# Altium PCB amirabbas_ahmadi.PcbDoc
Units mm, origin at the board's own origin, x right, y up, seen from the top; angles counter-clockwise.
Board outline 152.4 x 101.6 mm, 2 copper layers (Top Layer, Bottom Layer); 28 components, 23 nets, 118 pads, 55 vias.
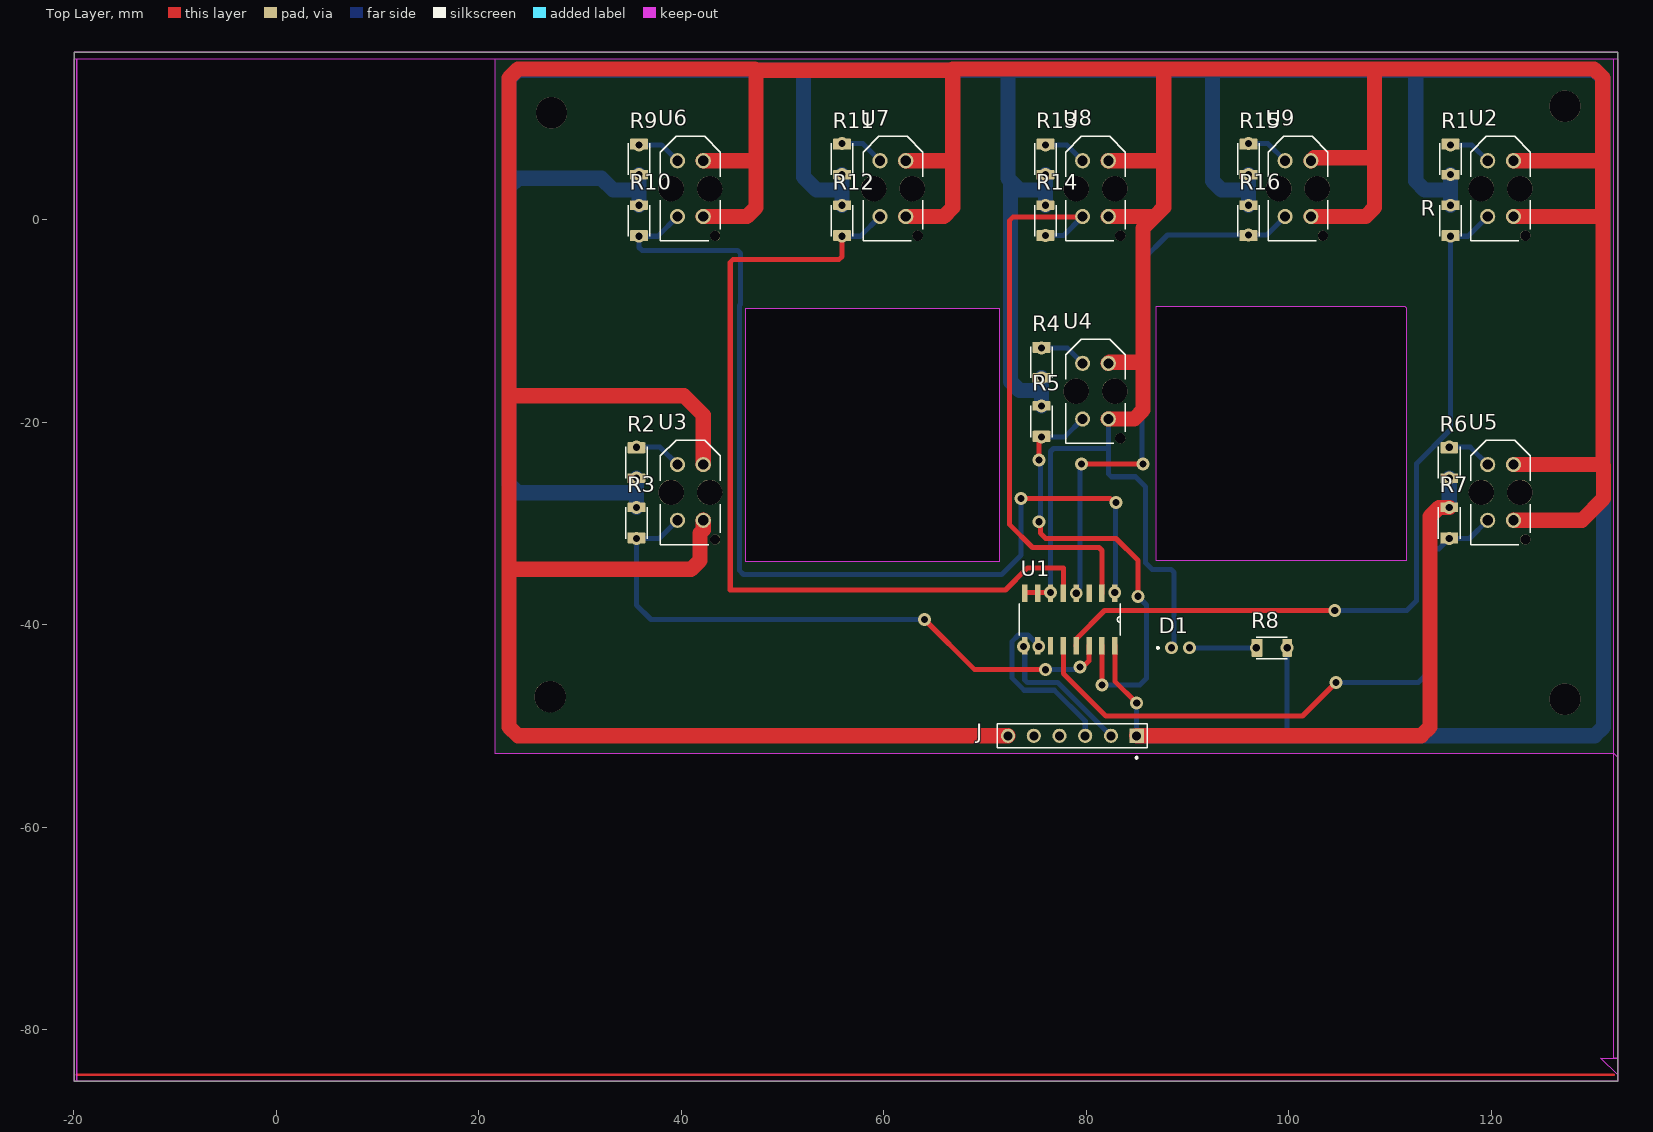
[diagram p0: Top Layer view]
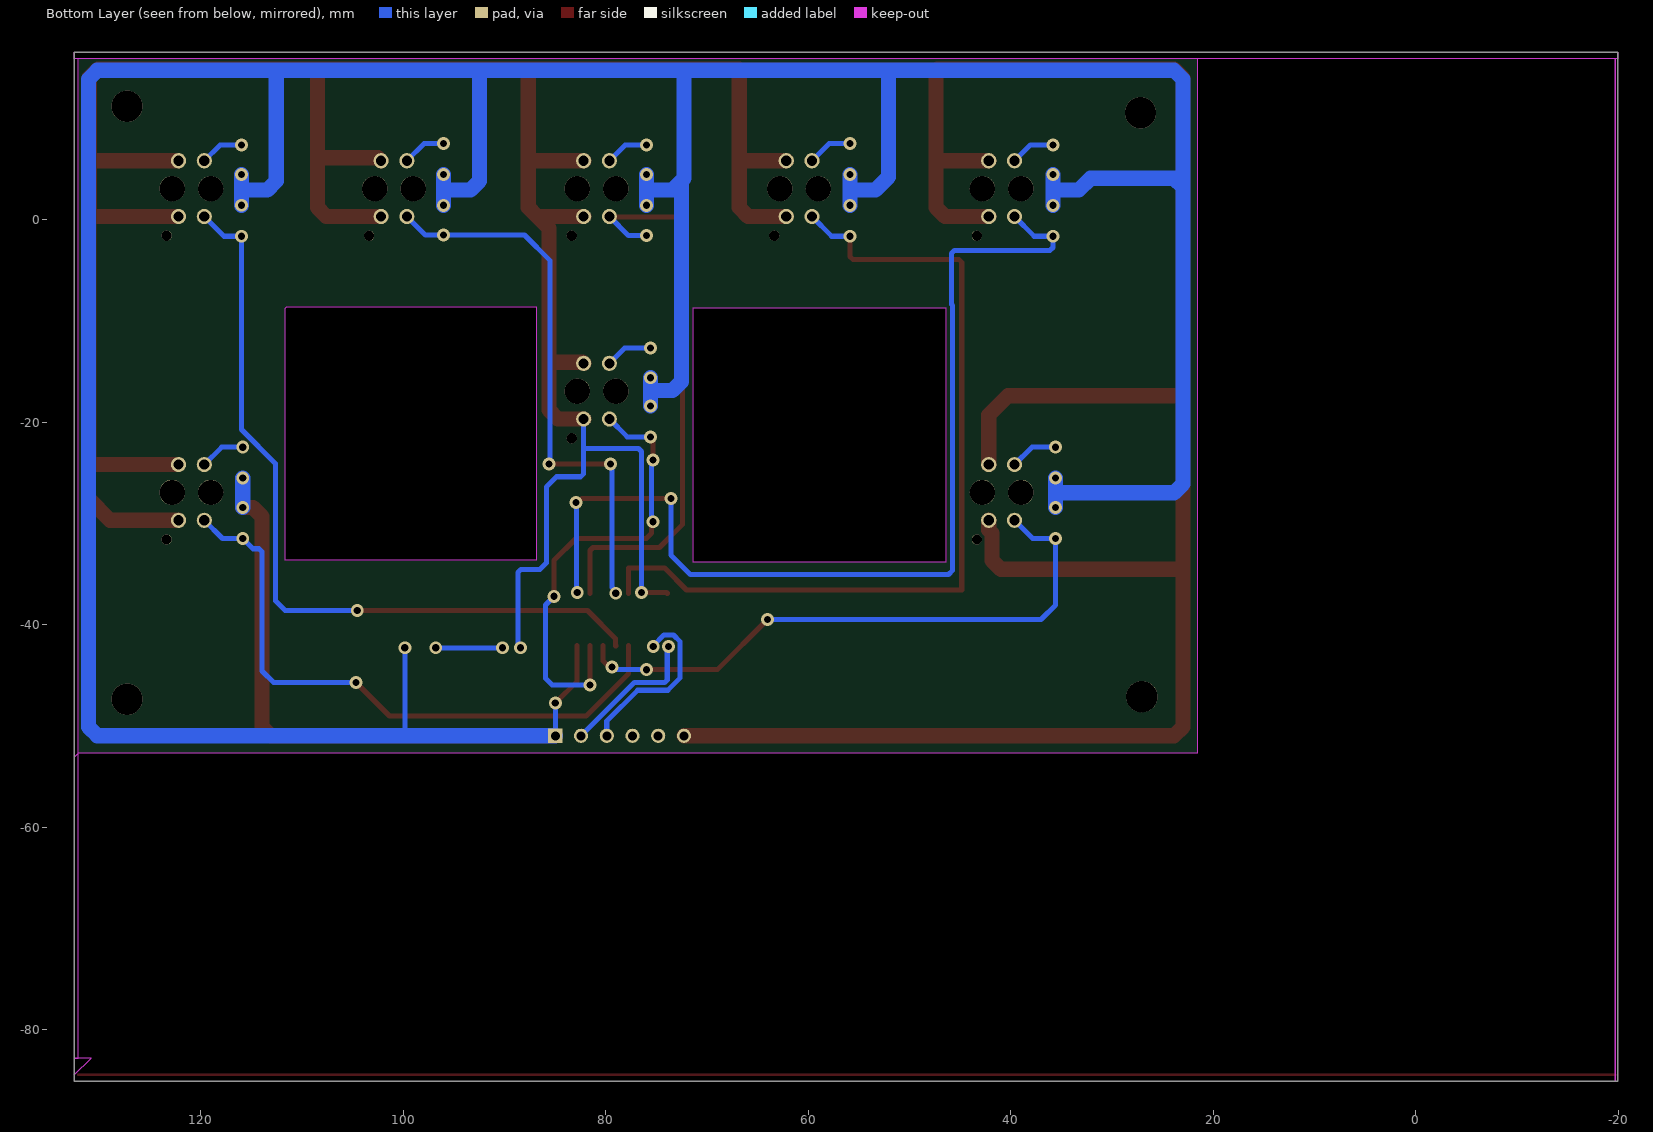
[diagram p1: Bottom Layer view, seen from below]
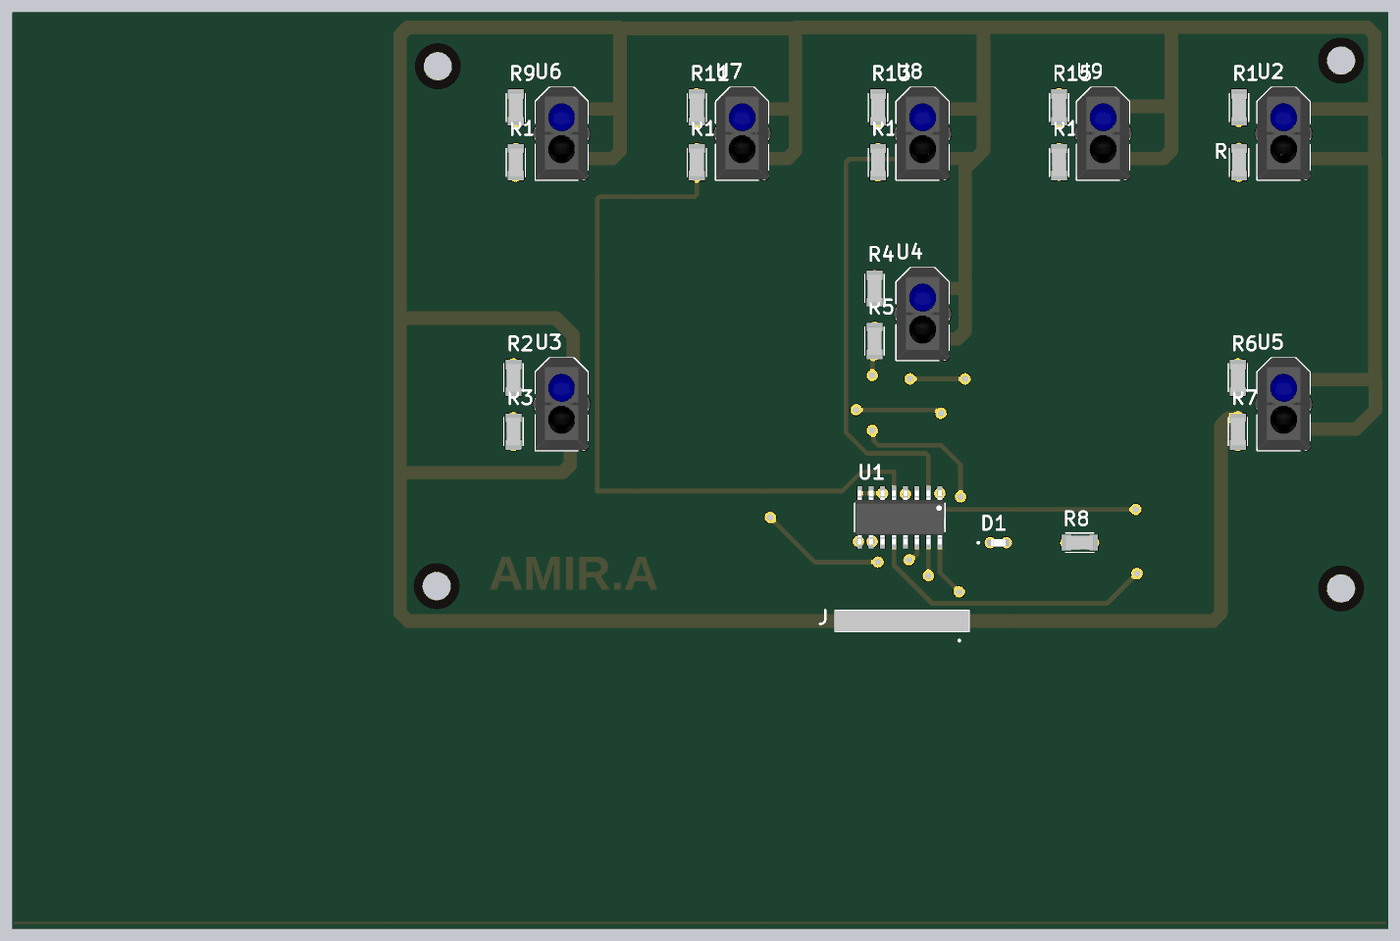
[diagram p2: 3D render of the assembled board from above, using the file's embedded part models]

## Layer stack, top to bottom
Top Solder: solder mask 0.0102, Solder Resist, Dk 3.5
Top Layer: signal copper 0.0356
Dielectric 1: dielectric 0.32, FR-4, Dk 4.8
Bottom Layer: signal copper 0.0356
Bottom Solder: solder mask 0.0102, Solder Resist, Dk 3.5

## Board outline
-19.939,-85.09 132.461,-85.09 132.461,16.51 -19.939,16.51
cut-out: 86.868,-8.636 86.868,-33.655 111.633,-33.655 111.633,-8.763 111.506,-8.636
cut-out: 46.355,-8.763 71.374,-8.763 71.374,-33.782 46.355,-33.782 46.355,-8.763
cut-out: 21.59,15.875 21.59,-52.705 132.08,-52.705 132.461,-53.086 132.461,-85.09 -19.685,-85.09 -19.685,15.875
cut-out: -19.685,15.875 -19.685,-85.09 -19.939,-85.09 -19.939,15.875
cut-out: 132.08,-82.804 132.08,15.875 132.461,15.875 132.461,-82.804
cut-out: 132.461,-84.455 130.81,-82.804 132.461,-82.804
cut-out: 132.461,15.875 132.461,16.51 -19.939,16.51 -19.939,15.875

## Design rules (kind name [scope] priority, off if disabled: settings)
Clearance [All] p1: gap=0.254 ignorepadtopadclearanceinfootprint=FALSE except(0: Arc-Hole Track-Hole SMDPad-Hole THPad-Hole Via-Hole Fill-Hole Poly-Hole Region-Hole Text-Hole)
PolygonConnect [All] p1: connectstyle=Relief reliefconductorwidth=0.254 reliefentries=4 polygonreliefangle="90 Angle" airgapwidth=0.254
RoutingVias [All] p1: holewidth=0.711 width=1.27 viastyle="Through Hole" minholewidth=0.711 minwidth=1.27 maxholewidth=0.711 maxwidth=1.27
SolderMaskExpansion [All] p1: expansion=0.102
Width [All] p1: maxlimit=1 minlimit=0.5 preferedwidth=0.254
30 further rules are at their usual default settings.

## Components (designator, comment, footprint, x,y, rotation, side; value= is the part's Value field where it differs from the comment)
D1 "KPT-1608ZGC" LED_KPT-1608ZGC 89.281,-42.291 r0 top
J "103321-6" TE_103321-6 78.613,-50.979 r180 top
R "2-1879462-9" RESC3115X65N 115.951,-0.127 r90 top
R1 "2-1879462-9" RESC3115X65N 115.951,5.969 r270 top
R2 "2-1879462-9" RESC3115X65N 35.56,-24.003 r270 top
R3 "2-1879462-9" RESC3115X65N 35.56,-29.972 r90 top
R4 "2-1879462-9" RESC3115X65N 75.565,-14.097 r270 top
R5 "2-1879462-9" RESC3115X65N 75.565,-19.939 r90 top
R6 "2-1879462-9" RESC3115X65N 115.824,-24.003 r270 top
R7 "2-1879462-9" RESC3115X65N 115.824,-29.972 r90 top
R8 "2-1879462-9" RESC3115X65N 98.298,-42.291 r0 top
R9 "2-1879462-9" RESC3115X65N 35.814,5.969 r270 top
R10 "2-1879462-9" RESC3115X65N 35.814,-0.127 r90 top
R11 "2-1879462-9" RESC3115X65N 55.88,5.969 r270 top
R12 "2-1879462-9" RESC3115X65N 55.88,-0.127 r90 top
R13 "2-1879462-9" RESC3115X65N 75.946,5.969 r270 top
R14 "2-1879462-9" RESC3115X65N 75.946,-0.127 r90 top
R15 "2-1879462-9" RESC3115X65N 96.012,5.969 r270 top
R16 "2-1879462-9" RESC3115X65N 96.012,-0.127 r90 top
U1 "74HC4051D" SOIC127P600X175-16N 78.359,-39.497 r270 top
U2 "TCRT5000" OPTO_TCRT5000 120.894,3.048 r90 top
U3 "TCRT5000" OPTO_TCRT5000 40.894,-26.952 r90 top
U4 "TCRT5000" OPTO_TCRT5000 80.894,-16.952 r90 top
U5 "TCRT5000" OPTO_TCRT5000 120.894,-26.952 r90 top
U6 "TCRT5000" OPTO_TCRT5000 40.894,3.048 r90 top
U7 "TCRT5000" OPTO_TCRT5000 60.894,3.048 r90 top
U8 "TCRT5000" OPTO_TCRT5000 80.894,3.048 r90 top
U9 "TCRT5000" OPTO_TCRT5000 100.894,3.048 r90 top

## Footprints (in the part's own frame and the unit in brackets; to place one, negate y for a bottom-side part, rotate by r counter-clockwise, add the part's x,y. Pads: shape width x height; smd on the part's side, far side on the other; paste and mask are expansions set on the pad)
LED_KPT-1608ZGC [mm]
  rect 0.8x0.8 smd: 1(0.825,0) 2(-0.825,0)
  silkscreen extent -2.32,-0.1 -2.12,0.1, body extent -0.8,-0.4 0.8,0.4, height 1.1
OPTO_TCRT5000 [mm]
  round 1.5 hole 1: A(2.75,1.27) CATH(2.75,-1.27) COLL(-2.75,1.27) E(-2.75,-1.27)
  round 1 hole 1 unplated: ""(-4.65,-2.45)
  round 2.5 hole 2.5 unplated: ""(0,1.9) ""(0,-1.9)
  silkscreen extent -5.15,-2.95 5.15,2.95, body extent -5.04,-3.4 5.16,3.4, height 7.2
RESC3115X65N [mm]
  rrect14% 1.09x1.77 smd: 1(-1.465,0)
  rrect14% 0.94x1.77 smd: 2(1.54,0)
  silkscreen extent -1.55,-1.06 1.55,1.06, body extent -1.55,-0.77 1.55,0.77, height 0.56
SOIC127P600X175-16N [mil]
  rect 67x21 smd: 1(-102,175) 2(-102,125) 3(-102,75) 4(-102,25) 5(-102,-25) 6(-102,-75) 7(-102,-125) 8(-102,-175) 9(102,-175) 10(102,-125) 11(102,-75) 12(102,-25) 13(102,25) 14(102,75) 15(102,125) 16(102,175)
  silkscreen extent -62,-197 62,197, body extent -118,-195 118,195, height 69
TE_103321-6 [mm]
  rect 1.398x1.398 hole 0.89: 1(-6.35,0)
  round 1.398 hole 0.89: 2(-3.81,0) 3(-1.27,0) 4(1.27,0) 5(3.81,0) 6(6.35,0)
  silkscreen extent -7.42,-1.17 7.42,2.27, body extent -7.42,-1.17 7.42,1.17, height 10.58

## Part data
D1: "1.6x0.8mm Smd Chip Led Lamp", Package="0603 Kingbright", Availability="In Stock", Check_prices=https://www.snapeda.com/parts/KPT-1608ZGC/Kingbright/view-part/?ref=eda, MF=Kingbright, MP=KPT-1608ZGC, Price=None, SnapEDA_Link=https://www.snapeda.com/parts/KPT-1608ZGC/Kingbright/view-part/?ref=snap
J: "Pin 06 MODII HDR SRST B / A .100CL 6 POS", Package=None, Availability=Unavailable, MF="TE Connectivity", Mouser-Purchase-URL=https://snapeda.com/shop?store=Mouser&id=4238467, MP=103321-6, Price=None, SnapEDA_Link=https://www.snapeda.com/parts/103321-6/TE%20Connectivity/view-part/4238467/?ref=snap
R R1 R2 R3 R4 R5 R6 R7 R8 R9 R10 R11 R12 R13 R14 R15 R16: "RES 0.24 OHM 1% 1/4W 1206", Package=1206, Power_Rating=".25 W", Resistance=24, Tolerance=1%, Availability=Unavailable, EU_RoHS_Compliance="Compliant with Exemptions", MF="TE Connectivity", MP=2-1879462-9, Price=None, SnapEDA_Link=https://www.snapeda.com/parts/2-1879462-9/TE%20Connectivity/view-part/2213899/?ref=snap
U1: "1 Circuit IC Switch 8:1 130Ohm 16-SOIC", Package="SOIC-16 Toshiba", Availability="In Stock", Check_prices=https://www.snapeda.com/parts/74HC4051D/Toshiba/view-part/?ref=eda, MF=Toshiba, MP=74HC4051D, Price=None, Purchase-URL=https://pricing.snapeda.com/search/part/74HC4051D/?ref=eda, SnapEDA_Link=https://www.snapeda.com/parts/74HC4051D/Toshiba/view-part/?ref=snap
U2 U3 U4 U5 U6 U7 U8 U9: "950 nm 60 mA Through Hole Reflective Optical Sensor with Transistor Output", Package=None, Availability=Unavailable, MP=TCRT5000, Price=None

## Free pads (board coordinates)
  round 3.1 hole 3.1 paste+0 mask+1: 1(27.051,-47.117) 1(27.178,10.541) 1(127.254,-47.371) 1(127.254,11.176)

## Via types
v1: diameter 1.27, hole 0.711, Top Layer to Bottom Layer, 55 vias

## Nets (pads, with @x,y where several pads share a name; then routed paths per layer and width w, separated by ;. In a path a pad name is that pad's centre, name@x,y a point inside that pad or via, vN(x,y) a via of type N, cw(c..) or ccw(c..) an arc to the next point about the centre after c; other vN are vias at no path point)
+5: J.1 R1.2 R2.2 R3.2 R4.2 R5.2 R6.2 R7.2 R8.2 R9.2 R10.2 R11.2 R12.2 R13.2 R14.2 R15.2 R16.2 R.2 U1.16 | length 463.1
  Top Layer w0.5: U1.16 82.804,-45.593 v1(84.963,-47.752)
  Top Layer w1.5: J.1 113.056,-50.979 113.935,-50.1 113.935,-29.327 114.814,-28.448 v1(115.824,-28.448)
  Bottom Layer w0.5: J.1 v1(84.963,-47.752) ; 99.695,-50.979 99.822,-50.852 v1(99.822,-42.291)
  Bottom Layer w1.5: v1(35.56,-28.448) 35.56,-26.987 ; v1(35.56,-25.527) 35.56,-26.987 ; v1(35.814,1.397) 35.814,2.921 ; v1(35.814,4.445) 35.814,2.921 ; v1(55.88,1.397) 55.88,2.921 ; v1(55.88,4.445) 55.88,2.921 ; v1(75.565,-18.415) 75.565,-17.018 ; v1(75.565,-15.621) 75.565,-17.018 ; v1(75.946,1.397) 75.946,2.921 ; v1(75.946,4.445) 75.946,2.921 ; J.1 99.695,-50.979 130.185,-50.979 131.064,-50.1 131.064,13.853 130.185,14.732 112.522,14.732 ; v1(96.012,1.397) 96.012,2.921 ; v1(96.012,4.445) 96.012,2.921 ; v1(115.824,-28.448) v1(115.824,-25.527) ; v1(115.951,1.413) 115.951,2.921 ; v1(115.951,4.429) 115.951,2.921 ; 22.987,3.185 22.987,13.853 23.866,14.732 51.943,14.732 ; 22.987,3.185 23.866,4.064 32.131,4.064 33.274,2.921 35.814,2.921 ; 22.987,3.185 22.987,-26.109 23.866,-26.987 35.56,-26.987 ; 51.943,14.732 72.263,14.732 ; 51.943,14.732 52.07,14.605 52.07,4.191 53.34,2.921 55.88,2.921 ; 72.263,14.732 92.456,14.732 ; 72.263,14.732 72.263,4.064 72.517,3.81 ; 72.517,3.81 72.517,-16.012 73.396,-16.891 75.438,-16.891 75.565,-17.018 ; 72.517,3.81 73.406,2.921 75.946,2.921 ; 92.456,14.732 92.456,3.8 93.335,2.921 96.012,2.921 ; 92.456,14.732 112.522,14.732 ; 112.522,14.732 112.522,3.8 113.401,2.921 115.951,2.921
GND: D1.2 J.6 U1.6 U1.7 U1.8 U2.CATH U2.E U3.CATH U3.E U4.CATH U4.E U5.CATH U5.E U6.CATH U6.E U7.CATH U7.E U8.CATH U8.E U9.CATH U9.E | length 523.7
  Top Layer w0.5: U1.8 73.99,-36.83 v1(76.454,-36.83)
  Top Layer w1.5: U3.E 42.164,-30.655 41.84,-30.979 41.84,-33.665 40.961,-34.544 22.987,-34.544 ; U3.CATH 42.164,-19.304 40.259,-17.399 22.987,-17.399 ; U6.E 46.492,0.298 47.371,1.177 47.371,14.732 ; U6.CATH 47.073,5.798 47.117,5.842 ; U7.E 65.923,0.298 66.802,1.177 66.802,5.842 ; U7.CATH 66.758,5.798 66.802,5.842 ; J.6 23.866,-50.979 22.987,-50.1 22.987,-34.544 ; U4.E 84.719,-19.702 85.598,-18.823 85.598,-14.097 ; U4.CATH 82.269,-14.097 85.598,-14.097 ; U8.E 86.751,0.298 ; U8.CATH 87.039,5.798 87.122,5.715 ; U9.E 107.579,0.298 108.458,1.177 108.458,14.871 ; U9.CATH 102.462,6.096 107.95,6.096 ; U5.E 128.921,-29.702 131.064,-27.559 131.064,-24.257 131.009,-24.202 ; U5.CATH 131.009,-24.202 ; U2.E 131.009,0.298 ; U2.CATH 130.993,5.798 ; 22.987,-34.544 22.987,-17.399 ; 22.987,-17.399 22.987,13.98 23.866,14.859 47.244,14.859 47.371,14.732 ; 47.371,14.732 66.675,14.732 66.802,14.859 ; 66.802,5.842 66.802,14.859 ; 66.802,14.859 87.491,14.859 87.503,14.871 ; 85.598,-14.097 85.598,-0.855 86.751,0.298 ; 86.751,0.298 87.63,1.177 87.63,14.744 87.503,14.871 ; 87.503,14.871 108.458,14.871 ; 108.458,14.871 130.114,14.871 130.993,13.992 130.993,5.798 ; 130.993,5.798 130.993,0.337 131.009,0.321 131.009,0.298 ; 131.009,-24.202 131.009,0.298
  Bottom Layer w0.5: v1(76.454,-36.83) 76.454,-22.899 76.747,-22.606 82.164,-22.606 ; U4.E 82.164,-22.606 ; v1@88.646,-42.164 88.646,-34.837 88.353,-34.544 86.487,-34.544 85.852,-33.909 85.852,-26.416 84.836,-25.4 82.457,-25.4 82.164,-25.107 82.164,-22.606
  other v1: 88.392,-42.291
NetD1_1: D1.1 R8.1 | length 6.6
  Bottom Layer w0.5: v1(90.17,-42.291) v1(96.774,-42.291)
NetR1_1: R1.1 U2.A | length 4.3
  Bottom Layer w0.5: v1(115.951,7.366) 118.056,7.366 U2.A
NetR2_1: R2.1 U3.A | length 4.8
  Bottom Layer w0.5: v1(35.56,-22.479) 37.901,-22.479 U3.A
NetR4_1: R4.1 U4.A | length 4.7
  Bottom Layer w0.5: v1(75.565,-12.7) 78.122,-12.7 U4.A
NetR6_1: R6.1 U5.A | length 4.5
  Bottom Layer w0.5: v1(115.824,-22.479) 117.901,-22.479 U5.A
NetR9_1: R9.1 U6.A | length 4.5
  Bottom Layer w0.5: v1(35.814,7.366) 38.056,7.366 U6.A
NetR11_1: R11.1 U7.A | length 4.4
  Bottom Layer w0.5: v1(55.88,7.493) 57.929,7.493 U7.A
NetR13_1: R13.1 U8.A | length 4.3
  Bottom Layer w0.5: v1(75.946,7.366) 78.056,7.366 U8.A
NetR15_1: R15.1 U9.A | length 4.3
  Bottom Layer w0.5: v1(96.012,7.493) 97.929,7.493 U9.A
OUT: U1.3
S0: U1.11
S1: J.3 U1.10 | length 17.5
  Bottom Layer w0.5: v1(75.298,-42.164) 75.298,-42.077 74.246,-41.025 73.303,-41.025 72.635,-41.692 72.635,-45.254 73.864,-46.482 76.835,-46.482 79.883,-49.53 J.3
S2: J.2 U1.9 | length 14.2
  Bottom Layer w0.5: v1(73.774,-42.164) 73.914,-42.304 73.914,-45.466 74.168,-45.72 77.164,-45.72 J.2
Y0: R.1 U1.13 U2.COLL | length 77.7
  Top Layer w0.5: U1.13 79.011,-42.071 79.011,-41.385 81.788,-38.608 v1(104.521,-38.608)
  Bottom Layer w0.5: v1(104.521,-38.608) 111.633,-38.608 112.585,-37.656 112.585,-24.107 115.951,-20.741 v1(115.951,-1.651) 117.675,-1.651 U2.COLL
Y1: R3.1 U1.14 U3.COLL | length 60.6
  Top Layer w0.5: v1(64.008,-39.497) 68.961,-44.45 v1(75.946,-44.45) ; v1(79.375,-44.196) 79.522,-44.049 79.797,-44.049 80.264,-43.582 U1.14
  Bottom Layer w0.5: U3.COLL 37.83,-31.496 v1(35.56,-31.496) 35.56,-38.061 36.996,-39.497 v1(64.008,-39.497) ; v1(75.946,-44.45) 78.913,-44.45 79.167,-44.196 v1(79.375,-44.196)
Y2: R5.1 U1.15 U4.COLL | length 46.4
  Top Layer w0.5: v1(75.315,-29.845) 75.462,-29.992 75.462,-30.973 75.985,-31.496 82.931,-31.496 85.09,-33.655 v1(85.09,-37.211) ; v1(75.315,-23.749) 75.315,-21.699 75.551,-21.463 75.837,-21.463 v1(75.565,-21.463) ; v1(81.534,-45.974) U1.15
  Bottom Layer w0.5: v1(75.315,-29.845) 75.462,-29.698 75.462,-23.896 v1(75.315,-23.749) ; v1(75.565,-21.463) 77.863,-21.463 U4.COLL ; v1(81.534,-45.974) 85.264,-45.974 85.938,-45.3 85.938,-38.059 v1(85.09,-37.211)
Y3: R7.1 U1.12 U5.COLL | length 61.3
  Top Layer w0.5: U1.12 77.724,-44.831 81.915,-49.022 101.346,-49.022 v1(104.648,-45.72)
  Bottom Layer w0.5: v1(104.648,-45.72) 112.776,-45.72 113.919,-44.577 113.919,-32.805 114.212,-32.512 114.808,-32.512 v1(115.824,-31.496) 117.83,-31.496 U5.COLL
Y4: R10.1 U1.1 U6.COLL | length 100.2
  Top Layer w0.5: v1(73.533,-27.559) 82.342,-27.559 82.723,-27.94 v1(82.931,-27.94)
  Bottom Layer w0.5: U6.COLL 37.675,-1.651 v1(35.814,-1.651) 35.814,-2.755 36.107,-3.048 45.554,-3.048 45.847,-3.341 45.847,-8.379 45.724,-8.502 45.724,-34.636 46.14,-35.052 71.628,-35.052 73.533,-33.147 v1(73.533,-27.559) ; v1(82.804,-36.83) 82.867,-36.767 82.867,-28.003 v1(82.931,-27.94)
Y5: R12.1 U1.5 U7.COLL | length 86.5
  Top Layer w0.5: v1(55.88,-1.651) 55.88,-3.644 55.587,-3.937 45.124,-3.937 44.831,-4.23 44.831,-36.576 72.009,-36.576 74.168,-34.417 77.724,-34.417 U1.5
  Bottom Layer w0.5: v1(55.88,-1.651) 57.675,-1.651 U7.COLL
Y6: R14.1 U1.2 U8.COLL | length 56.3
  Top Layer w0.5: U8.COLL 79.584,0.258 72.767,0.258 72.394,-0.115 72.394,-30.103 74.676,-32.385 81.241,-32.385 81.534,-32.678 U1.2
  Bottom Layer w0.5: v1(75.946,-1.592) 77.734,-1.592 U8.COLL
Y7: R16.1 U1.4 U9.COLL | length 55.2
  Top Layer w0.5: v1(79.502,-24.13) v1(85.598,-24.13)
  Bottom Layer w0.5: v1(78.994,-36.906) 78.994,-36.698 79.355,-36.337 79.355,-24.277 v1(79.502,-24.13) ; v1(85.598,-24.13) 85.471,-24.003 85.471,-4.064 88.011,-1.524 v1(96.012,-1.524) 97.802,-1.524 U9.COLL
pads on no net: J.4 J.5 U2. U3. U4. U5. U6. U7. U8. U9.
copper on no net: | length 151.8
  Top Layer w0.254: -19.685,-84.455 132.08,-84.455

## Other copper
Multi-Layer:
  text "AMIR.A" at 32.814,-47.498 h6